# EAGLE board Programming_interface_PCB_Rev5 (EAGLE 9.6.2), part 1 of 2
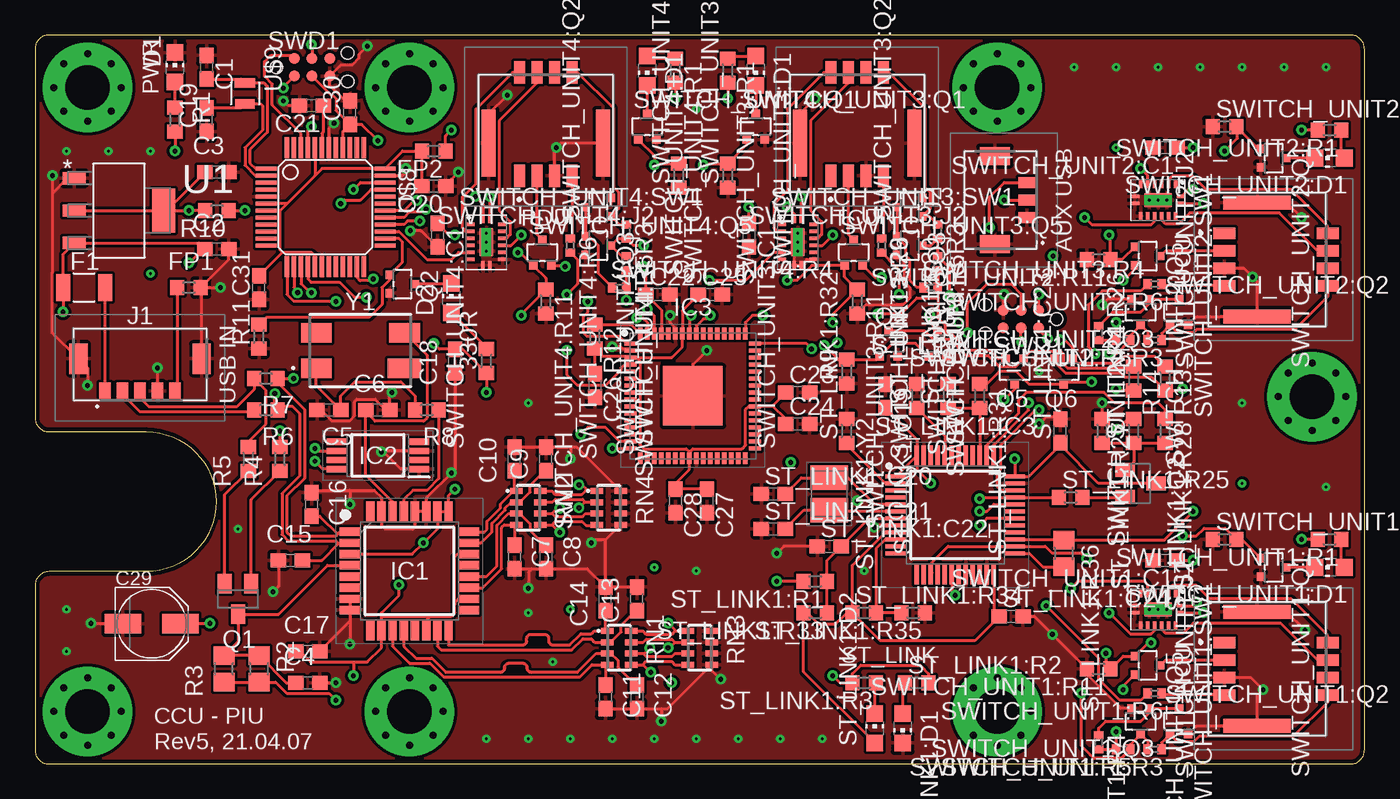
[diagram p0: board, top side]
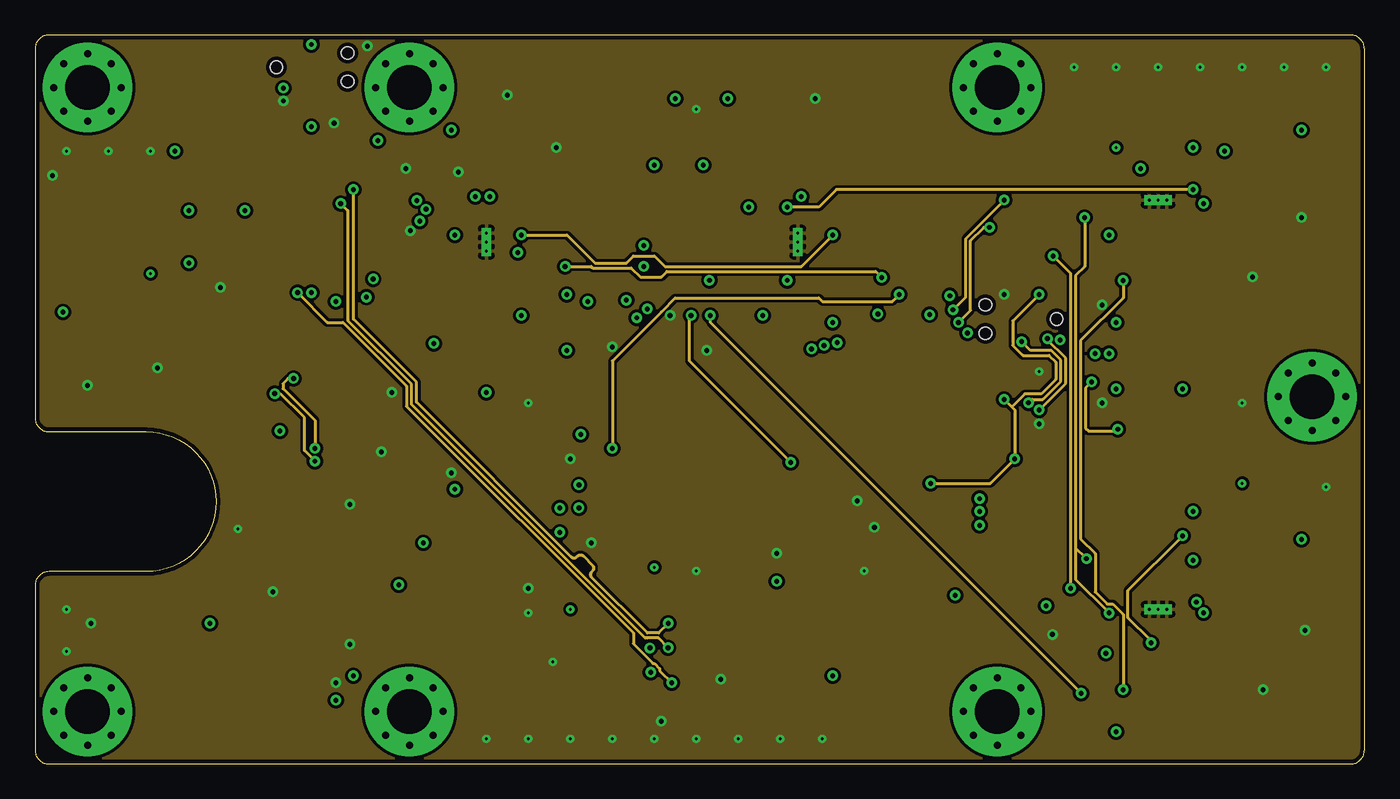
[diagram p1: board, inner layer Route2]
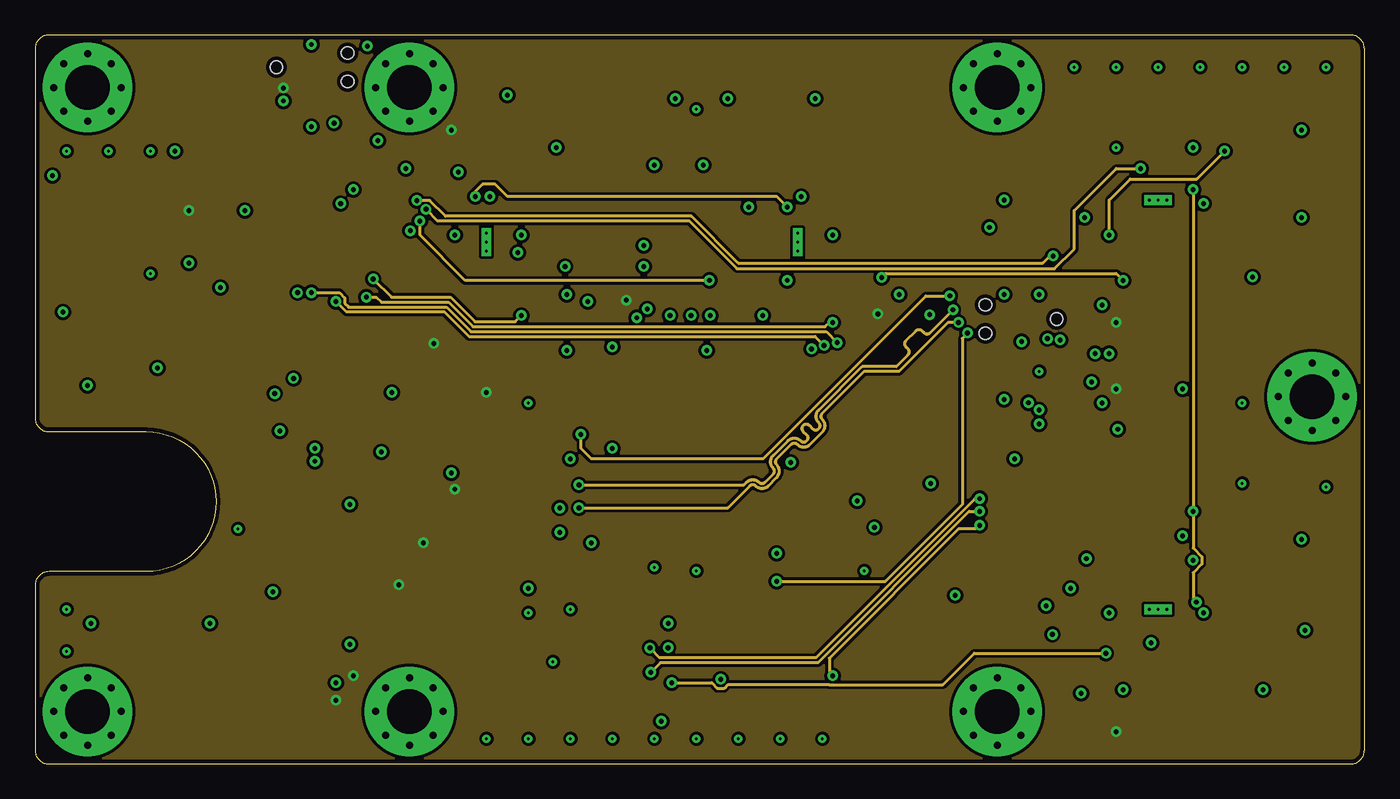
[diagram p2: board, inner layer Route15]
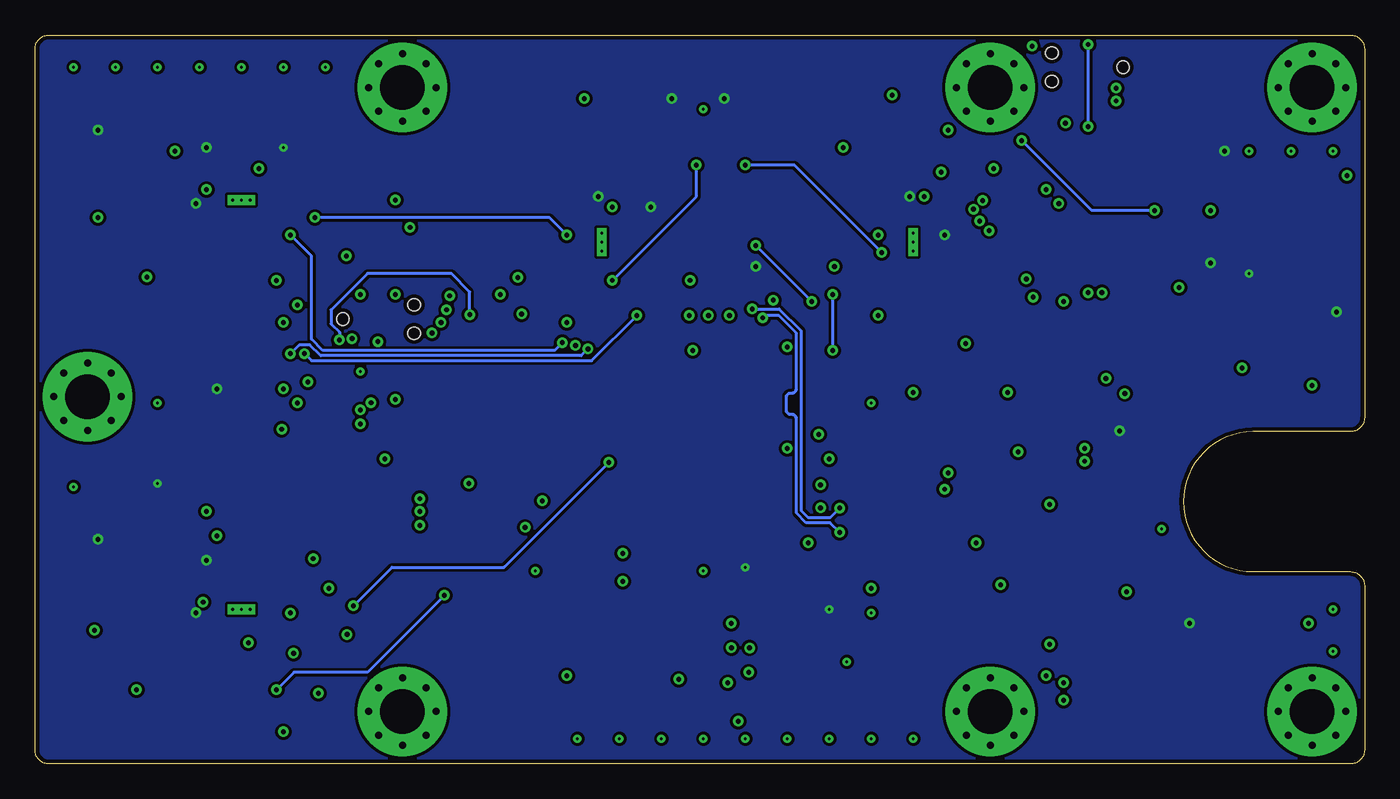
[diagram p3: board, bottom side, seen from below]

Size 95 x 52.11 mm. Coordinates in mm from the lower left corner, seen from the top.
Outline: 94,52.11 1,52.11 arc90 0,51.11 0,24.75 arc90 1,23.75 7.95,23.75 arc-180 7.95,13.75 1,13.75 arc90 0,12.75 0,1 arc90 1,0 94,0 arc90 95,1 95,51.11 arc90 94,52.11
Copper layers (1+2*15+16): Top 0.043mm / dielectric 0.1248mm / Route2 0.035mm / dielectric 1.2mm / Route15 0.035mm / dielectric 0.1248mm / Bottom 0.043mm
Design rules "default *": minimum track width 6mil, minimum drill 0.2mm, track to track 6mil, track to pad 6mil, pad to pad 6mil, via to via 6mil, smd to smd 6mil, copper to edge 0.3mm, drill to drill 6mil, minimum pad ring 10mil, minimum via ring 0.2mm, stop-mask expansion 4mil, vias tented up to drill 0mil, thermal gap 10mil
Net classes: 0 default: width 0.2 mm

## Footprints (pad centres in the part's own frame; a part is rotated, then mirrored left to right if it is on the bottom)
R0603 = smd 1 x 1.1: 1 -0.85,0; 2 0.85,0
C0603 = smd 1.1 x 1: 1 -0.85,0; 2 0.85,0
PANASONIC_C = smd 2.6 x 1.4: + 2.05,0; - -2.05,0
CHIP-LED0805 = smd 1.2 x 1.2: A 0,-1.05; C 0,1.05
OZCJ = smd 1 x 1.9: 1 -1.5,0; 2 1.5,0
QFP80P900X900X160-32N = smd 1.475 x 0.6: 1 -4.238,2.8; 2 -4.238,2; 3 -4.238,1.2; 4 -4.238,0.4; 5 -4.238,-0.4; 6 -4.238,-1.2; 7 -4.238,-2; 8 -4.238,-2.8; 17 4.238,-2.8; 18 4.238,-2; 19 4.238,-1.2; 20 4.238,-0.4; 21 4.238,0.4; 22 4.238,1.2; 23 4.238,2; 24 4.238,2.8 | smd 0.6 x 1.475: 9 -2.8,-4.238; 10 -2,-4.238; 11 -1.2,-4.238; 12 -0.4,-4.238; 13 0.4,-4.238; 14 1.2,-4.238; 15 2,-4.238; 16 2.8,-4.238; 25 2.8,4.238; 26 2,4.238; 27 1.2,4.238; 28 0.4,4.238; 29 -0.4,4.238; 30 -1.2,4.238; 31 -2,4.238; 32 -2.8,4.238
SOP65P640X120-8N = smd 1.475 x 0.45: 1 -2.938,0.975; 2 -2.938,0.325; 3 -2.938,-0.325; 4 -2.938,-0.975; 5 2.938,-0.975; 6 2.938,-0.325; 7 2.938,0.325; 8 2.938,0.975
QFN50P900X900X90-65N = smd 0.85 x 0.3: 1 -4.45,3.75; 2 -4.45,3.25; 3 -4.45,2.75; 4 -4.45,2.25; 5 -4.45,1.75; 6 -4.45,1.25; 7 -4.45,0.75; 8 -4.45,0.25; 9 -4.45,-0.25; 10 -4.45,-0.75; 11 -4.45,-1.25; 12 -4.45,-1.75; 13 -4.45,-2.25; 14 -4.45,-2.75; 15 -4.45,-3.25; 16 -4.45,-3.75; 33 4.45,-3.75; 34 4.45,-3.25; 35 4.45,-2.75; 36 4.45,-2.25; 37 4.45,-1.75; 38 4.45,-1.25; 39 4.45,-0.75; 40 4.45,-0.25; 41 4.45,0.25; 42 4.45,0.75; 43 4.45,1.25; 44 4.45,1.75; 45 4.45,2.25; 46 4.45,2.75; 47 4.45,3.25; 48 4.45,3.75 | smd 0.3 x 0.85: 17 -3.75,-4.45; 18 -3.25,-4.45; 19 -2.75,-4.45; 20 -2.25,-4.45; 21 -1.75,-4.45; 22 -1.25,-4.45; 23 -0.75,-4.45; 24 -0.25,-4.45; 25 0.25,-4.45; 26 0.75,-4.45; 27 1.25,-4.45; 28 1.75,-4.45; 29 2.25,-4.45; 30 2.75,-4.45; 31 3.25,-4.45; 32 3.75,-4.45; 49 3.75,4.45; 50 3.25,4.45; 51 2.75,4.45; 52 2.25,4.45; 53 1.75,4.45; 54 1.25,4.45; 55 0.75,4.45; 56 0.25,4.45; 57 -0.25,4.45; 58 -0.75,4.45; 59 -1.25,4.45; 60 -1.75,4.45; 61 -2.25,4.45; 62 -2.75,4.45; 63 -3.25,4.45; 64 -3.75,4.45 | smd 4.25 x 4.25: 65 0,0
5055680571 = smd 0.8 x 1.2: 1 -2.5,-1.882; 2 -1.25,-1.882; 3 0,-1.882; 4 1.25,-1.882; 5 2.5,-1.882 | smd 1.3 x 2.15: MP1 -4.4,0.412; MP2 4.4,0.412
5055680371 = smd 0.8 x 1.2: 1 -1.25,-1.882; 2 0,-1.882; 3 1.25,-1.882 | smd 1.3 x 2.15: MP1 -3.15,0.412; MP2 3.15,0.412
SOT23 = smd 1 x 1.4: 1 -0.95,-1.1; 2 0.95,-1.1; 3 0,1.1
SOT323 = smd 0.6 x 0.55: 1 -0.65,-0.925; 2 0.65,-0.925; 3 0,0.925
R0805 = smd 1.3 x 1.5: 1 -0.95,0; 2 0.95,0
CAY16-J4 = smd 0.425 x 0.9: 1 -1.2,-0.85; 2 -1.2,0.85; 3 -0.4,-0.85; 4 -0.4,0.85; 5 0.4,-0.85; 6 0.4,0.85; 7 1.2,-0.85; 8 1.2,0.85
QFP50P900X900X160-48N = smd 1.475 x 0.3: 1 -4.238,2.75; 2 -4.238,2.25; 3 -4.238,1.75; 4 -4.238,1.25; 5 -4.238,0.75; 6 -4.238,0.25; 7 -4.238,-0.25; 8 -4.238,-0.75; 9 -4.238,-1.25; 10 -4.238,-1.75; 11 -4.238,-2.25; 12 -4.238,-2.75; 25 4.238,-2.75; 26 4.238,-2.25; 27 4.238,-1.75; 28 4.238,-1.25; 29 4.238,-0.75; 30 4.238,-0.25; 31 4.238,0.25; 32 4.238,0.75; 33 4.238,1.25; 34 4.238,1.75; 35 4.238,2.25; 36 4.238,2.75 | smd 0.3 x 1.475: 13 -2.75,-4.238; 14 -2.25,-4.238; 15 -1.75,-4.238; 16 -1.25,-4.238; 17 -0.75,-4.238; 18 -0.25,-4.238; 19 0.25,-4.238; 20 0.75,-4.238; 21 1.25,-4.238; 22 1.75,-4.238; 23 2.25,-4.238; 24 2.75,-4.238; 37 2.75,4.238; 38 2.25,4.238; 39 1.75,4.238; 40 1.25,4.238; 41 0.75,4.238; 42 0.25,4.238; 43 -0.25,4.238; 44 -0.75,4.238; 45 -1.25,4.238; 46 -1.75,4.238; 47 -2.25,4.238; 48 -2.75,4.238
TC2030-IDC-NL = smd 0.787 x 0.787: 1 1.27,-0.635; 2 1.27,0.635; 3 2.54,-0.635; 4 2.54,0.635; 5 3.81,-0.635; 6 3.81,0.635 | hole 0.889: 0,0; 5.08,-1.016; 5.08,1.016
RESC3226X100N = smd 1.75 x 2.65: 1 -1.15,0; 2 1.15,0
5054330871 = smd 0.8 x 1.6: 1 1.875,3.517; 2 1.875,-3.873; 3 0.625,3.517; 4 0.625,-3.873; 5 -0.625,3.517; 6 -0.625,-3.873; 7 -1.875,3.517; 8 -1.875,-3.873 | smd 1 x 4.8: MP1 4.075,1.177; MP2 -4.075,1.177
R0402 = smd 0.6 x 0.7: 1 -0.5,0; 2 0.5,0
QFN16-4X4 = smd 0.25 x 0.6: 1 -0.25,1.65; 8 -0.25,-1.65; 9 0.25,-1.65; 16 0.25,1.65 | smd 0.6 x 0.25: 2 -1.15,1.25; 3 -1.15,0.75; 4 -1.15,0.25; 5 -1.15,-0.25; 6 -1.15,-0.75; 7 -1.15,-1.25; 10 1.15,-1.25; 11 1.15,-0.75; 12 1.15,-0.25; 13 1.15,0.25; 14 1.15,0.75; 15 1.15,1.25 | smd 1 x 2: EXP 0,0 | drill 0.2 pad 0.4 square: P$1 0,0; P$2 0,0.635; P$3 0,-0.635
SOT230P700X180-4N = smd 1.626 x 0.889: 1 -3.2,2.311; 2 -3.2,0; 3 -3.2,-2.311 | smd 1.626 x 3.175: 4 3.2,0
M3_MOUNTING_HOLE = drill 0.5 pad 0.8: P$1 -2.4,0; P$2 0,2.4; P$3 2.4,0; P$4 0,-2.4; P$5 -1.697,1.697; P$6 1.697,1.697; P$7 1.697,-1.697; P$8 -1.697,-1.697 | drill 3.2 pad 6.4: P$10 0,0
TQFP48 = smd 0.3 x 1.5: 1 -2.75,-4.25; 2 -2.25,-4.25; 3 -1.75,-4.25; 4 -1.25,-4.25; 5 -0.75,-4.25; 6 -0.25,-4.25; 7 0.25,-4.25; 8 0.75,-4.25; 9 1.25,-4.25; 10 1.75,-4.25; 11 2.25,-4.25; 12 2.75,-4.25; 25 2.75,4.25; 26 2.25,4.25; 27 1.75,4.25; 28 1.25,4.25; 29 0.75,4.25; 30 0.25,4.25; 31 -0.25,4.25; 32 -0.75,4.25; 33 -1.25,4.25; 34 -1.75,4.25; 35 -2.25,4.25; 36 -2.75,4.25 | smd 1.5 x 0.3: 13 4.25,-2.75; 14 4.25,-2.25; 15 4.25,-1.75; 16 4.25,-1.25; 17 4.25,-0.75; 18 4.25,-0.25; 19 4.25,0.25; 20 4.25,0.75; 21 4.25,1.25; 22 4.25,1.75; 23 4.25,2.25; 24 4.25,2.75; 37 -4.25,2.75; 38 -4.25,2.25; 39 -4.25,1.75; 40 -4.25,1.25; 41 -4.25,0.75; 42 -4.25,0.25; 43 -4.25,-0.25; 44 -4.25,-0.75; 45 -4.25,-1.25; 46 -4.25,-1.75; 47 -4.25,-2.25; 48 -4.25,-2.75
ST2012SB32768H5KPWAA = smd 0.7 x 1.4: P$1 0.75,0 | smd 0.7 x 1.44: P$2 -0.75,0
ABMM-6.000MHZ-B2-T = smd 2.2 x 1.4: 1 -3.15,-1.27; 2 -3.15,1.27; 3 3.15,1.27 | smd 2.4 x 1.4: 4 3.15,-1.27

## Placement (x,y rotation side)
330R  1K1  [R0603]  32.25,28.8 90 top
C1  4Pf?  [C0603]  12.25,49.8 270 top
C2  0.1uF  [C0603]  13,36.8 0 top
C3  10uF  [C0603]  13,42.3 0 top
C4  0.1uF  [C0603]  19.5,5.8 0 top
C5  33pF  [C0603]  21,25.3 180 top
C6  33pF  [C0603]  24.5,25.3 0 top
C7  22pF  [C0603]  34.25,14.8 270 top
C8  22pF  [C0603]  36.5,14.8 270 top
C9  22pF  [C0603]  36.5,21.8 90 top
C10  22pF  [C0603]  34.25,21.8 90 top
C11  22pF  [C0603]  40.75,4.8 270 top
C12  22pF  [C0603]  43,4.8 270 top
C13  22pF  [C0603]  43,11.8 90 top
C14  22pF  [C0603]  40.75,11.8 90 top
C15  22pF  [C0603]  18.25,14.55 0 top
C16  22pF  [C0603]  19.75,18.55 270 top
C17  0.1uF  [C0603]  19.5,8.05 0 top
C18  0.1uF  [C0603]  30,28.8 90 top
C19  4Pf?  [C0603]  12.25,46.05 90 top
C20  0.1uF  [C0603]  28.5,41.3 180 top
C21  1uF  [C0603]  19.75,47.05 180 top
C22  1uF  [C0603]  44.5,33.55 0 top
C23  1uF  [C0603]  54.5,26.55 0 top
C24  0.1uF  [C0603]  54.5,24.3 0 top
C25  0.1uF  [C0603]  48.25,33.55 0 top
C26  0.1uF  [C0603]  40,27.05 270 top
C27  1uF  [C0603]  48,18.8 270 top
C28  0.1uF  [C0603]  45.75,18.8 270 top
C29  100uF  [PANASONIC_C]  8.34,10.02 0 top
C30  0.1uF  [C0603]  22.5,46.55 90 top
C31  0.1uF  [C0603]  16,34.05 90 top
D1  CHIP-LED0805  [CHIP-LED0805]  10,49.8 0 top
D2  CHIP-LED0805  [CHIP-LED0805]  29.75,33.3 0 top
F1  OZCJ0050  [OZCJ]  3.5,34.05 0 top
FP1  [R0603]  11,34.05 0 top
FP2  [R0603]  28.5,43.8 180 top
IC1  TUSB2046IBVFR  [QFP80P900X900X160-32N]  26.75,13.8 0 top
IC2  SN75240PW  [SOP65P640X120-8N]  24.5,22.05 180 top
IC3  CP2108-B03-GM  [QFN50P900X900X90-65N]  47,26.3 0 top
J1  505568-0571  [5055680571]  7.5,28.55 0 top
J2  505567-0371  [5055680371]  69,40.3 90 top
Q1  BC817  [SOT23]  14.5,11.8 180 top
Q2  2N7002PW,115  [SOT323]  26.25,34.3 270 top
Q3  2N7002PW,115  [SOT323]  64.5,30.05 0 top
Q4  2N7002PW,115  [SOT323]  61,30.05 0 top
Q5  BSS223PW  [SOT323]  70,28.05 180 top
Q6  BSS223PW  [SOT323]  73.5,28.05 180 top
R1  1K6  [R0603]  10,46.05 270 top
R2  22  [R0805]  16,6.8 270 top
R3  1K5  [R0805]  13.5,6.8 90 top
R4  15K  [R0603]  17.5,21.8 90 top
R5  1K5  [R0603]  15.25,21.8 90 top
R6  27  [R0603]  16.5,25.3 180 top
R7  27  [R0603]  16.5,27.55 180 top
R8  1K5  [R0603]  28,25.3 180 top
R9  100K  [R0603]  58,28.05 90 top
R10  10K  [R0603]  13,39.55 180 top
R11  10K  [R0603]  16,30.55 90 top
R12  100K  [R0603]  40,30.55 270 top
R13  10K  [R0603]  80.75,27.55 270 top
R14  10K  [R0603]  78.5,27.55 270 top
RN1  CAY16-27R0F4LF  [CAY16-J4]  41.75,8.3 270 top
RN2  CAY16-27R0F4LF  [CAY16-J4]  35.25,18.3 270 top
RN3  CAY16-1502F4LF  [CAY16-J4]  47.5,8.3 270 top
RN4  CAY16-1502F4LF  [CAY16-J4]  41,18.3 270 top
ST_LINK1:C19  0.1uF  [C0603]  60.75,26.3 270 top
ST_LINK1:C20  10pF  [C0603]  52.75,19.3 0 top
ST_LINK1:C21  10pF  [C0603]  52.75,16.8 0 top
ST_LINK1:C22  0.1uF  [C0603]  56.75,15.55 0 top
ST_LINK1:C23  0.1uF  [C0603]  73.25,23.8 90 top
ST_LINK1:C24  0.1uF  [C0603]  69.75,10.55 0 top
ST_LINK1:D1  CHIP-LED0805  [CHIP-LED0805]  62,2.55 180 top
ST_LINK1:D2  CHIP-LED0805  [CHIP-LED0805]  60,2.55 0 top
ST_LINK1:IC3  STM32F103CBT6TR  [QFP50P900X900X160-48N]  65.75,17.8 0 top
ST_LINK1:Q2  BC817  [SOT23]  79,20.05 270 top
ST_LINK1:R1  0  [R0603]  55.75,13.05 180 top
ST_LINK1:R2  330  [R0603]  63,5.8 0 top
ST_LINK1:R3  330  [R0603]  59.25,5.8 180 top
ST_LINK1:R25  1K5  [R0603]  74,19.05 0 top
ST_LINK1:R26  10K  [R0603]  78.5,23.8 90 top
ST_LINK1:R27  36K  [R0603]  76.25,23.8 270 top
ST_LINK1:R28  100  [R0603]  80.75,23.8 270 top
ST_LINK1:R29  100K  [R0603]  63,26.3 90 top
ST_LINK1:R30  4K7  [R0603]  65.25,26.3 90 top
ST_LINK1:R31  2K7  [R0603]  67.5,26.3 270 top
ST_LINK1:R32  10K  [R0603]  58,23.8 90 top
ST_LINK1:R33  100K  [R0603]  55.75,10.8 180 top
ST_LINK1:R34  4K7  [R0603]  59.25,10.8 0 top
ST_LINK1:R35  4K7  [R0603]  62.75,10.8 180 top
ST_LINK1:R36  100  [R0805]  73.5,15.05 270 top
ST_LINK1:SWD1  SWD_TAGCONNECTNO-LEG  [TC2030-IDC-NL]  73,31.8 180 top
ST_LINK1:Y2  NX3225GD-8MHZ-STD-CRA-3  [RESC3226X100N]  56.75,19.3 270 top
SWD1  SWD_TAGCONNECTNO-LEG  [TC2030-IDC-NL]  17.25,49.8 0 top
SWITCH_UNIT1:C1  0.1uF  [C0603]  80.75,14.55 180 top
SWITCH_UNIT1:D1  CHIP-LED0805  [CHIP-LED0805]  92.5,14.05 90 top
SWITCH_UNIT1:J2  505433-0871  [5054330871]  88.5,6.8 90 top
SWITCH_UNIT1:Q1  2N7002PW,115  [SOT323]  88.5,14.05 270 top
SWITCH_UNIT1:Q2  2N7002PW,115  [SOT323]  81.75,3.05 0 top
SWITCH_UNIT1:Q3  2N7002PW,115  [SOT323]  79,3.05 180 top
SWITCH_UNIT1:Q5  2N7002PW,115  [SOT323]  79.5,7.05 270 top
SWITCH_UNIT1:R1  1K6  [R0603]  92.5,16.05 180 top
SWITCH_UNIT1:R2  -  [R0603]  85,16.05 0 top
SWITCH_UNIT1:R3  -  [R0402]  80,1.05 180 top
SWITCH_UNIT1:R4  1K  [R0402]  76,1.55 270 top
SWITCH_UNIT1:R5  1K  [R0402]  77.75,1.05 180 top
SWITCH_UNIT1:R6  0R  [R0402]  80,5.05 180 top
SWITCH_UNIT1:R11  10K  [R0603]  76,6.8 180 top
SWITCH_UNIT1:SW1  TMUX1309QBQBRQ1  [QFN16-4X4]  80.25,11.05 270 top
SWITCH_UNIT2:C1  0.1uF  [C0603]  80.75,44.05 180 top
SWITCH_UNIT2:D1  CHIP-LED0805  [CHIP-LED0805]  92.5,43.3 90 top
SWITCH_UNIT2:J2  505433-0871  [5054330871]  88.5,36.05 90 top
SWITCH_UNIT2:Q1  2N7002PW,115  [SOT323]  88.5,43.3 270 top
SWITCH_UNIT2:Q2  2N7002PW,115  [SOT323]  81.75,32.3 0 top
SWITCH_UNIT2:Q3  2N7002PW,115  [SOT323]  79,32.3 180 top
SWITCH_UNIT2:Q5  2N7002PW,115  [SOT323]  79.5,36.3 270 top
SWITCH_UNIT2:R1  1K6  [R0603]  92.5,45.3 180 top
SWITCH_UNIT2:R2  -  [R0603]  85,45.55 0 top
SWITCH_UNIT2:R3  -  [R0402]  80,30.3 180 top
SWITCH_UNIT2:R4  1K  [R0402]  76,30.8 270 top
SWITCH_UNIT2:R5  1K  [R0402]  77.75,30.3 180 top
SWITCH_UNIT2:R6  0R  [R0402]  80,34.3 180 top
SWITCH_UNIT2:R11  10K  [R0603]  76,36.05 180 top
SWITCH_UNIT2:SW1  TMUX1309QBQBRQ1  [QFN16-4X4]  80.25,40.3 270 top
SWITCH_UNIT3:C1  0.1uF  [C0603]  51,37.8 270 top
SWITCH_UNIT3:D1  CHIP-LED0805  [CHIP-LED0805]  51.5,49.55 180 top
SWITCH_UNIT3:J2  505433-0871  [5054330871]  58.75,45.55 180 top
SWITCH_UNIT3:Q1  2N7002PW,115  [SOT323]  51.5,45.55 0 top
SWITCH_UNIT3:Q2  2N7002PW,115  [SOT323]  62.5,39.8 90 top
SWITCH_UNIT3:Q3  2N7002PW,115  [SOT323]  62.5,37.05 270 top
SWITCH_UNIT3:Q5  2N7002PW,115  [SOT323]  58.5,36.55 0 top
SWITCH_UNIT3:R1  1K6  [R0603]  49.5,49.55 270 top
SWITCH_UNIT3:R2  -  [R0603]  49.5,42.05 90 top
SWITCH_UNIT3:R3  -  [R0402]  64.5,38.05 270 top
SWITCH_UNIT3:R4  1K  [R0402]  64,34.05 0 top
SWITCH_UNIT3:R5  1K  [R0402]  64.5,35.8 270 top
SWITCH_UNIT3:R6  0R  [R0402]  60.5,37.05 270 top
SWITCH_UNIT3:R11  10K  [R0603]  58.75,33.05 270 top
SWITCH_UNIT3:SW1  TMUX1309QBQBRQ1  [QFN16-4X4]  54.5,37.3 0 top
SWITCH_UNIT4:C1  0.1uF  [C0603]  28.75,37.8 270 top
SWITCH_UNIT4:D1  CHIP-LED0805  [CHIP-LED0805]  43.75,49.55 180 top
SWITCH_UNIT4:J2  505433-0871  [5054330871]  36.5,45.55 180 top
SWITCH_UNIT4:Q1  2N7002PW,115  [SOT323]  43.75,45.55 0 top
SWITCH_UNIT4:Q2  2N7002PW,115  [SOT323]  40.25,39.8 90 top
SWITCH_UNIT4:Q3  2N7002PW,115  [SOT323]  40.25,37.05 270 top
SWITCH_UNIT4:Q5  2N7002PW,115  [SOT323]  36.25,36.55 0 top
SWITCH_UNIT4:R1  1K6  [R0603]  45.75,49.55 270 top
SWITCH_UNIT4:R2  -  [R0603]  46,42.05 90 top
SWITCH_UNIT4:R3  -  [R0402]  42.25,38.05 270 top
SWITCH_UNIT4:R4  1K  [R0402]  41.75,34.05 0 top
SWITCH_UNIT4:R5  1K  [R0402]  42.25,35.8 270 top
SWITCH_UNIT4:R6  0R  [R0402]  38.25,37.05 270 top
SWITCH_UNIT4:R11  10K  [R0603]  36.5,33.05 270 top
SWITCH_UNIT4:SW1  TMUX1309QBQBRQ1  [QFN16-4X4]  32.25,37.3 0 top
U1  LD1117S33TR  [SOT230P700X180-4N]  6,39.55 0 top
U$1  M3_MOUNTING_HOLE  [M3_MOUNTING_HOLE]  3.75,3.75 0 top
U$2  M3_MOUNTING_HOLE  [M3_MOUNTING_HOLE]  26.75,3.75 0 top
U$3  M3_MOUNTING_HOLE  [M3_MOUNTING_HOLE]  68.75,3.75 0 top
U$4  M3_MOUNTING_HOLE  [M3_MOUNTING_HOLE]  91.25,26.25 0 top
U$5  M3_MOUNTING_HOLE  [M3_MOUNTING_HOLE]  3.75,48.36 0 top
U$6  M3_MOUNTING_HOLE  [M3_MOUNTING_HOLE]  26.75,48.36 0 top
U$7  M3_MOUNTING_HOLE  [M3_MOUNTING_HOLE]  68.75,48.36 0 top
U$8  SAMD21G18A-ARDUINO  [TQFP48]  20.75,39.8 270 top
U$9  ST2012SB32768H5KPWAA  [ST2012SB32768H5KPWAA]  15,47.93 270 top
Y1  ABMM-6.000MHZ-B2-T  [ABMM-6.000MHZ-B2-T]  23.25,29.55 0 top

## Library data of the parts
330R C1-C31 FP1 FP2 R1-R14 ST_LINK1:C19-ST_LINK1:C24 ST_LINK1:R1-ST_LINK1:R3 ST_LINK1:R25-ST_LINK1:R36 SWITCH_UNIT1:C1 SWITCH_UNIT1:R1-SWITCH_UNIT1:R6 SWITCH_UNIT1:R11 SWITCH_UNIT2:C1 SWITCH_UNIT2:R1-SWITCH_UNIT2:R6 SWITCH_UNIT2:R11 SWITCH_UNIT3:C1 SWITCH_UNIT3:R1-SWITCH_UNIT3:R6 SWITCH_UNIT3:R11 SWITCH_UNIT4:C1 SWITCH_UNIT4:R1-SWITCH_UNIT4:R6 SWITCH_UNIT4:R11 = CASE-RCL
D1 D2 ST_LINK1:D1 ST_LINK1:D2 SWITCH_UNIT1:D1 SWITCH_UNIT2:D1 SWITCH_UNIT3:D1 SWITCH_UNIT4:D1 = CASE-LED
F1 = CASE-Fuse
IC1 = Programming_interface_lib; DESCRIPTION: USB Interface IC 4-Port 12 Mbps USB Full-Speed Hub W/Optional Serial EEPROM Interface 32-LQFP -40 to 85; HEIGHT: 1.6mm; MANUFACTURER_NAME: Texas Instruments; MANUFACTURER_PART_NUMBER: TUSB2046IBVFR; MOUSER_PART_NUMBER: 595-TUSB2046IBVFR; MOUSER_PRICE-STOCK: https://www.mouser.com/Search/Refine.aspx?Keyword=595-TUSB2046IBVFR
IC2 = Programming_interface_lib; DESCRIPTION: Dual USB Port Transient Suppressor; HEIGHT: 1.2mm; MANUFACTURER_NAME: Texas Instruments; MANUFACTURER_PART_NUMBER: SN75240PW; MOUSER_PART_NUMBER: 595-SN75240PW; MOUSER_PRICE-STOCK: https://www.mouser.com/Search/Refine.aspx?Keyword=595-SN75240PW; RS_PART_NUMBER: 6199853P; RS_PRICE-STOCK: http://uk.rs-online.com/web/p/products/6199853P
IC3 = Programming_interface_lib; DESCRIPTION: SILICON LABS - CP2108-B03-GM - USB TO UART BRIDGE, -40 TO 85DEG C; HEIGHT: 0.9mm; MANUFACTURER_NAME: Silicon Labs; MANUFACTURER_PART_NUMBER: CP2108-B03-GM
J1 = Programming_interface_lib; ALLIED_NUMBER: 71085525; DESCRIPTION: Headers & Wire Housings MicroLockPlus 1.25MM VERT HDR SR 5CKT BLK; HEIGHT: 4.05mm; MANUFACTURER_NAME: Molex; MANUFACTURER_PART_NUMBER: 505568-0571; RS_PART_NUMBER: 1615926P; RS_PRICE-STOCK: http://uk.rs-online.com/web/p/products/1615926P
J2 = RescueRunner
Q1-Q6 ST_LINK1:Q2 SWITCH_UNIT1:Q1-SWITCH_UNIT1:Q3 SWITCH_UNIT1:Q5 SWITCH_UNIT2:Q1-SWITCH_UNIT2:Q3 SWITCH_UNIT2:Q5 SWITCH_UNIT3:Q1-SWITCH_UNIT3:Q3 SWITCH_UNIT3:Q5 SWITCH_UNIT4:Q1-SWITCH_UNIT4:Q3 SWITCH_UNIT4:Q5 = CASE-Transistors
RN1-RN4 = RescueRunner; ALLIED_NUMBER: 70276336; DESCRIPTION: BOURNS - CAY16-270J4LF - RESISTOR, ARRAY, 27R, 5%, 0.125W; HEIGHT: mm; MANUFACTURER_NAME: Bourns; MANUFACTURER_PART_NUMBER: CAY16-270J4LF; RS_PART_NUMBER: 7408782; RS_PRICE-STOCK: http://uk.rs-online.com/web/p/products/7408782
ST_LINK1:IC3 = Programming_interface_lib; DESCRIPTION: STMICROELECTRONICS - STM32F103CBT6TR - ARM MCU, STM32 Family STM32F1 Series Microcontrollers, ARM Cortex-M3, 32bit, 72 MHz, 128 KB, 20 KB; HEIGHT: 1.6mm; MANUFACTURER_NAME: STMicroelectronics; MANUFACTURER_PART_NUMBER: STM32F103CBT6TR
ST_LINK1:SWD1 SWD1 = CASE-Prog_Header
ST_LINK1:Y2 = Programming_interface_lib; DESCRIPTION: A small surface-mount type crystal unit, ideal for an engine control CPU clock; delivering the high reliability that is particularly demanded by automotive; HEIGHT: 1mm; MANUFACTURER_NAME: NDK; MANUFACTURER_PART_NUMBER: NX3225GD-8MHZ-STD-CRA-3; RS_PART_NUMBER: 1847983; RS_PRICE-STOCK: http://uk.rs-online.com/web/p/products/1847983
SWITCH_UNIT1:J2 SWITCH_UNIT2:J2 SWITCH_UNIT3:J2 SWITCH_UNIT4:J2 = Programming_interface_lib; DESCRIPTION: CONN HEADER SMD 8POS 1.25MM; HEIGHT: 7.25mm; MANUFACTURER_NAME: Molex; MANUFACTURER_PART_NUMBER: 5054330871
SWITCH_UNIT1:SW1 SWITCH_UNIT2:SW1 SWITCH_UNIT3:SW1 SWITCH_UNIT4:SW1 U$1-U$9 = Programming_interface_lib
U1 = CASE-Voltage_regulators; MPN: LD1117S33TR; OC_FARNELL: 2253484; OC_NEWARK: 89K0627; PACKAGE: SOT223-3; SUPPLIER: STMicroelectronics
Y1 = Programming_interface_lib; DESCRIPTION: Crystals 6.000MHz, 18pF 20ppm; HEIGHT: mm; MANUFACTURER_NAME: ABRACON; MANUFACTURER_PART_NUMBER: ABMM-6.000MHZ-B2-T; RS_PART_NUMBER: 1712721P; RS_PRICE-STOCK: http://uk.rs-online.com/web/p/products/1712721P

## Nets
+3V3: 330R.1 C3.1 C17.1 C18.2 FP2.1 IC1.3 IC1.10 IC1.14 IC1.18 IC1.22 IC1.25 IC1.26 Q5.2 R2.2 R3.1 R10.2 R14.2 SWD1.1 SWITCH_UNIT1:R4.2 SWITCH_UNIT1:R5.2 SWITCH_UNIT2:R4.2 SWITCH_UNIT2:R5.2 SWITCH_UNIT3:R4.2 SWITCH_UNIT3:R5.2 SWITCH_UNIT4:R4.2 SWITCH_UNIT4:R5.2 U1.2 U1.4
+5V: C2.1 C22.1 C29.+ F1.1 IC3.60 IC3.61 Q6.2 R1.2 R4.2 R13.2 SWITCH_UNIT1:C1.1 SWITCH_UNIT1:R1.2 SWITCH_UNIT1:SW1.16 SWITCH_UNIT2:C1.1 SWITCH_UNIT2:R1.2 SWITCH_UNIT2:SW1.16 SWITCH_UNIT3:C1.1 SWITCH_UNIT3:R1.2 SWITCH_UNIT3:SW1.16 SWITCH_UNIT4:C1.1 SWITCH_UNIT4:R1.2 SWITCH_UNIT4:SW1.16 U1.3
D1_2_N: C11.1 IC1.11 RN1.7
D1_2_P: C12.1 IC1.12 RN1.5
D1_N: RN1.8 RN3.7 ST_LINK1:IC3.32
D1_P: RN1.6 RN3.5 ST_LINK1:IC3.33 ST_LINK1:R25.1
D2_2_N: C13.1 IC1.15 RN1.3
D2_2_P: C14.1 IC1.16 RN1.1
D2_N: RN1.4 RN3.3 U$8.33
D2_P: RN1.2 RN3.1 U$8.34
D3_2_N: C7.1 IC1.19 RN2.7
D3_2_P: C8.1 IC1.20 RN2.5
D3_N: IC3.63 RN2.8 RN4.7
D3_P: IC3.62 RN2.6 RN4.5
D4_2_N: C9.1 IC1.23 RN2.3
D4_2_P: C10.1 IC1.24 RN2.1
D4_N: J2.3 RN2.4 RN4.3
D4_P: J2.2 RN2.2 RN4.1
GND: C1.1 C2.2 C3.2 C4.2 C5.2 C6.2 C7.2 C8.2 C9.2 C10.2 C11.2 C12.2 C13.2 C14.2 C15.1 C16.1 C17.2 C18.1 C19.1 C20.1 C21.2 C22.2 C23.2 C24.2 C25.2 C26.2 C27.2 C28.2 C29.- C30.2 C31.1 D1.C FP1.2 IC1.7 IC1.8 IC1.27 IC1.28 IC1.31 IC2.1 IC2.3 IC3.2 IC3.25 IC3.59 IC3.65 J1.4 J1.MP1 J1.MP2 J2.1 J2.MP1 J2.MP2 Q2.2 Q3.2 Q4.2 R9.1 R11.1 RN3.2 RN3.4 RN3.6 RN3.8 RN4.2 RN4.4 RN4.6 RN4.8 ST_LINK1:C19.1 ST_LINK1:C20.1 ST_LINK1:C21.1 ST_LINK1:C22.1 ST_LINK1:C23.2 ST_LINK1:C24.2 ST_LINK1:D1.C ST_LINK1:IC3.8 ST_LINK1:IC3.20 ST_LINK1:IC3.23 ST_LINK1:IC3.35 ST_LINK1:IC3.47 ST_LINK1:R27.1 ST_LINK1:R29.2 ST_LINK1:R30.2 ST_LINK1:R32.2 ST_LINK1:R35.1 ST_LINK1:SWD1.5 SWD1.5 SWITCH_UNIT1:C1.2 SWITCH_UNIT1:J2.5 SWITCH_UNIT1:J2.MP1 SWITCH_UNIT1:J2.MP2 SWITCH_UNIT1:Q1.2 SWITCH_UNIT1:Q2.2 SWITCH_UNIT1:Q3.2 SWITCH_UNIT1:R2.1 SWITCH_UNIT1:R11.2 SWITCH_UNIT1:SW1.8 SWITCH_UNIT1:SW1.9 SWITCH_UNIT1:SW1.10 SWITCH_UNIT1:SW1.EXP SWITCH_UNIT1:SW1.P$1 SWITCH_UNIT1:SW1.P$2 SWITCH_UNIT1:SW1.P$3 SWITCH_UNIT2:C1.2 SWITCH_UNIT2:J2.5 SWITCH_UNIT2:J2.MP1 SWITCH_UNIT2:J2.MP2 SWITCH_UNIT2:Q1.2 SWITCH_UNIT2:Q2.2 SWITCH_UNIT2:Q3.2 SWITCH_UNIT2:R2.1 SWITCH_UNIT2:R11.2 SWITCH_UNIT2:SW1.8 SWITCH_UNIT2:SW1.9 SWITCH_UNIT2:SW1.10 SWITCH_UNIT2:SW1.EXP SWITCH_UNIT2:SW1.P$1 SWITCH_UNIT2:SW1.P$2 SWITCH_UNIT2:SW1.P$3 SWITCH_UNIT3:C1.2 SWITCH_UNIT3:J2.5 SWITCH_UNIT3:J2.MP1 SWITCH_UNIT3:J2.MP2 SWITCH_UNIT3:Q1.2 SWITCH_UNIT3:Q2.2 SWITCH_UNIT3:Q3.2 SWITCH_UNIT3:R2.1 SWITCH_UNIT3:R11.2 SWITCH_UNIT3:SW1.8 SWITCH_UNIT3:SW1.9 SWITCH_UNIT3:SW1.10 SWITCH_UNIT3:SW1.EXP SWITCH_UNIT3:SW1.P$1 SWITCH_UNIT3:SW1.P$2 SWITCH_UNIT3:SW1.P$3 SWITCH_UNIT4:C1.2 SWITCH_UNIT4:J2.5 SWITCH_UNIT4:J2.MP1 SWITCH_UNIT4:J2.MP2 SWITCH_UNIT4:Q1.2 SWITCH_UNIT4:Q2.2 SWITCH_UNIT4:Q3.2 SWITCH_UNIT4:R2.1 SWITCH_UNIT4:R11.2 SWITCH_UNIT4:SW1.8 SWITCH_UNIT4:SW1.9 SWITCH_UNIT4:SW1.10 SWITCH_UNIT4:SW1.EXP SWITCH_UNIT4:SW1.P$1 SWITCH_UNIT4:SW1.P$2 SWITCH_UNIT4:SW1.P$3 U1.1 U$8.5 U$8.18 U$8.35 U$8.42
GND_2: IC2.5
GND_3: IC2.7
N$1: C4.1 IC1.4 Q1.3 R2.1 R3.2
N$2: FP1.1 J1.5
N$3: Q1.1 R4.1
N$4: Q1.2 R5.1
N$5: Q4.3 Q5.1 R14.1
N$6: Q3.3 Q6.1 R13.1
N$7: D1.A R1.1
N$8: C20.2 C31.2 FP2.2 U$8.6 U$8.17 U$8.36 U$8.44
N$9: C1.2 U$8.1 U$9.P$2
N$10: IC1.29 R8.1
N$11: C6.1 IC1.30 Y1.3
N$12: C5.1 R8.2 Y1.1
N$13: C19.2 U$8.2 U$9.P$1
N$14: SWD1.2 U$8.46
N$15: C30.1 R10.1 SWD1.3 U$8.40
N$16: SWD1.4 U$8.45
N$17: C21.1 U$8.43
N$18: 330R.2 D2.A
N$19: IC3.64 R12.1
N$20: D2.C Q2.3
N$21: Q6.3 ST_LINK1:R26.2 ST_LINK1:R31.1
N$22: Q2.1 R11.2 U$8.26
N$23: Q5.3 ST_LINK1:C19.2 ST_LINK1:C23.1 ST_LINK1:C24.1 ST_LINK1:D2.A ST_LINK1:IC3.1 ST_LINK1:IC3.9 ST_LINK1:IC3.24 ST_LINK1:IC3.36 ST_LINK1:IC3.48 ST_LINK1:Q2.3 ST_LINK1:R33.2 ST_LINK1:R34.1 ST_LINK1:SWD1.1
N$27: F1.2 J1.1
NCU_NRST_ON: SWITCH_UNIT1:Q1.1 SWITCH_UNIT1:Q5.1 SWITCH_UNIT1:R2.2 SWITCH_UNIT1:R11.1 U$8.14
NCU_ON: SWITCH_UNIT1:SW1.6 U$8.30
PDU_NRST_ON: SWITCH_UNIT4:Q1.1 SWITCH_UNIT4:Q5.1 SWITCH_UNIT4:R2.2 SWITCH_UNIT4:R11.1 U$8.23
PDU_ON: SWITCH_UNIT4:SW1.6 U$8.27
RX_NCU: IC3.56 SWITCH_UNIT1:Q3.3 SWITCH_UNIT1:R3.2 SWITCH_UNIT1:R5.1
RX_PDU: IC3.1 SWITCH_UNIT4:Q3.3 SWITCH_UNIT4:R3.2 SWITCH_UNIT4:R5.1
RX_TCU: IC3.15 SWITCH_UNIT3:Q3.3 SWITCH_UNIT3:R3.2 SWITCH_UNIT3:R5.1
RX_UCU: IC3.48 SWITCH_UNIT2:Q3.3 SWITCH_UNIT2:R3.2 SWITCH_UNIT2:R5.1
ST_LINK1:N$1: ST_LINK1:D1.A ST_LINK1:R2.1
ST_LINK1:N$3: ST_LINK1:D2.C ST_LINK1:R3.1
ST_LINK1:N$7: ST_LINK1:Q2.2 ST_LINK1:R25.2
ST_LINK1:N$8: ST_LINK1:Q2.1 ST_LINK1:R26.1 ST_LINK1:R27.2 ST_LINK1:R28.2
ST_LINK1:N$15: ST_LINK1:IC3.39 ST_LINK1:R30.1 ST_LINK1:R31.2
ST_LINK1:N$16: ST_LINK1:IC3.2 ST_LINK1:R32.1
ST_LINK1:N$21: ST_LINK1:IC3.44 ST_LINK1:R29.1
ST_LINK1:N$22: ST_LINK1:C20.2 ST_LINK1:IC3.5 ST_LINK1:Y2.1
ST_LINK1:N$23: ST_LINK1:IC3.10 ST_LINK1:R34.2 ST_LINK1:R35.2
ST_LINK1:N$24: ST_LINK1:C21.2 ST_LINK1:IC3.6 ST_LINK1:Y2.2
ST_LINK1:N$25: ST_LINK1:C22.2 ST_LINK1:IC3.7 ST_LINK1:R1.1 ST_LINK1:R33.1
ST_LINK1:N$26: ST_LINK1:IC3.25 ST_LINK1:R36.2
ST_LINK1:STLK_LED: ST_LINK1:IC3.30 ST_LINK1:R2.2 ST_LINK1:R3.2
ST_LINK1:STLK_RX: ST_LINK1:IC3.13
ST_LINK1:STLK_TX: ST_LINK1:IC3.12
ST_LINK1:STM_NRST: ST_LINK1:R1.2 ST_LINK1:SWD1.3
ST_LINK1:STM_SWCLK: ST_LINK1:IC3.37 ST_LINK1:SWD1.4
ST_LINK1:STM_SWDIO: ST_LINK1:IC3.34 ST_LINK1:SWD1.2
ST_LINK1:SWO: ST_LINK1:IC3.31
ST_LINK1:USB_RENUM: ST_LINK1:IC3.38 ST_LINK1:R28.1
ST_LINK_EN: Q3.1 Q4.1 R9.2 U$8.13
ST_LINK_NRST_OUT: ST_LINK1:IC3.18 SWITCH_UNIT1:Q5.2 SWITCH_UNIT2:Q5.2 SWITCH_UNIT3:Q5.2 SWITCH_UNIT4:Q5.2
ST_LINK_SWDCLK_OUT: ST_LINK1:IC3.15 ST_LINK1:IC3.26 SWITCH_UNIT1:SW1.12 SWITCH_UNIT2:SW1.12 SWITCH_UNIT3:SW1.12 SWITCH_UNIT4:SW1.12
ST_LINK_SWDIO_OUT: ST_LINK1:IC3.27 ST_LINK1:R36.1 SWITCH_UNIT1:SW1.1 SWITCH_UNIT2:SW1.1 SWITCH_UNIT3:SW1.1 SWITCH_UNIT4:SW1.1
SWITCH_UNIT1:N$2: SWITCH_UNIT1:D1.C SWITCH_UNIT1:Q1.3
SWITCH_UNIT1:N$3: SWITCH_UNIT1:D1.A SWITCH_UNIT1:R1.1
SWITCH_UNIT1:N$4: SWITCH_UNIT1:Q2.3 SWITCH_UNIT1:Q3.1 SWITCH_UNIT1:R4.1
SWITCH_UNIT1:RX_STM32: SWITCH_UNIT1:J2.7 SWITCH_UNIT1:R6.1
SWITCH_UNIT1:TX_STM32: SWITCH_UNIT1:J2.8 SWITCH_UNIT1:Q2.1 SWITCH_UNIT1:R3.1
SWITCH_UNIT1:UNIT_NRST: SWITCH_UNIT1:J2.3 SWITCH_UNIT1:Q5.3
SWITCH_UNIT1:UNIT_SWCLK: SWITCH_UNIT1:J2.4 SWITCH_UNIT1:SW1.13
SWITCH_UNIT1:UNIT_SWDIO: SWITCH_UNIT1:J2.2 SWITCH_UNIT1:SW1.3
SWITCH_UNIT2:N$2: SWITCH_UNIT2:D1.C SWITCH_UNIT2:Q1.3
SWITCH_UNIT2:N$3: SWITCH_UNIT2:D1.A SWITCH_UNIT2:R1.1
SWITCH_UNIT2:N$4: SWITCH_UNIT2:Q2.3 SWITCH_UNIT2:Q3.1 SWITCH_UNIT2:R4.1
SWITCH_UNIT2:RX_STM32: SWITCH_UNIT2:J2.7 SWITCH_UNIT2:R6.1
SWITCH_UNIT2:TX_STM32: SWITCH_UNIT2:J2.8 SWITCH_UNIT2:Q2.1 SWITCH_UNIT2:R3.1
SWITCH_UNIT2:UNIT_NRST: SWITCH_UNIT2:J2.3 SWITCH_UNIT2:Q5.3
SWITCH_UNIT2:UNIT_SWCLK: SWITCH_UNIT2:J2.4 SWITCH_UNIT2:SW1.13
SWITCH_UNIT2:UNIT_SWDIO: SWITCH_UNIT2:J2.2 SWITCH_UNIT2:SW1.3
SWITCH_UNIT3:N$2: SWITCH_UNIT3:D1.C SWITCH_UNIT3:Q1.3
SWITCH_UNIT3:N$3: SWITCH_UNIT3:D1.A SWITCH_UNIT3:R1.1
SWITCH_UNIT3:N$4: SWITCH_UNIT3:Q2.3 SWITCH_UNIT3:Q3.1 SWITCH_UNIT3:R4.1
SWITCH_UNIT3:RX_STM32: SWITCH_UNIT3:J2.7 SWITCH_UNIT3:R6.1
SWITCH_UNIT3:TX_STM32: SWITCH_UNIT3:J2.8 SWITCH_UNIT3:Q2.1 SWITCH_UNIT3:R3.1
SWITCH_UNIT3:UNIT_NRST: SWITCH_UNIT3:J2.3 SWITCH_UNIT3:Q5.3
SWITCH_UNIT3:UNIT_SWCLK: SWITCH_UNIT3:J2.4 SWITCH_UNIT3:SW1.13
SWITCH_UNIT3:UNIT_SWDIO: SWITCH_UNIT3:J2.2 SWITCH_UNIT3:SW1.3
SWITCH_UNIT4:N$2: SWITCH_UNIT4:D1.C SWITCH_UNIT4:Q1.3
SWITCH_UNIT4:N$3: SWITCH_UNIT4:D1.A SWITCH_UNIT4:R1.1
SWITCH_UNIT4:N$4: SWITCH_UNIT4:Q2.3 SWITCH_UNIT4:Q3.1 SWITCH_UNIT4:R4.1
SWITCH_UNIT4:RX_STM32: SWITCH_UNIT4:J2.7 SWITCH_UNIT4:R6.1
SWITCH_UNIT4:TX_STM32: SWITCH_UNIT4:J2.8 SWITCH_UNIT4:Q2.1 SWITCH_UNIT4:R3.1
SWITCH_UNIT4:UNIT_NRST: SWITCH_UNIT4:J2.3 SWITCH_UNIT4:Q5.3
SWITCH_UNIT4:UNIT_SWCLK: SWITCH_UNIT4:J2.4 SWITCH_UNIT4:SW1.13
SWITCH_UNIT4:UNIT_SWDIO: SWITCH_UNIT4:J2.2 SWITCH_UNIT4:SW1.3
TCU_NRST_ON: SWITCH_UNIT3:Q1.1 SWITCH_UNIT3:Q5.1 SWITCH_UNIT3:R2.2 SWITCH_UNIT3:R11.1 U$8.16
TCU_ON: SWITCH_UNIT3:SW1.6 U$8.28
TX_NCU: IC3.57 SWITCH_UNIT1:R6.2
TX_PDU: IC3.4 SWITCH_UNIT4:R6.2
TX_TCU: IC3.16 SWITCH_UNIT3:R6.2
TX_UCU: IC3.49 SWITCH_UNIT2:R6.2
UCU_NRST_ON: SWITCH_UNIT2:Q1.1 SWITCH_UNIT2:Q5.1 SWITCH_UNIT2:R2.2 SWITCH_UNIT2:R11.1 U$8.15
UCU_ON: SWITCH_UNIT2:SW1.6 U$8.29
USB_D1_N: C15.2 IC1.2 IC2.8 R6.1
USB_D1_P: C16.2 IC1.1 IC2.6 R7.1
USB_D2_N: J1.2 R6.2
USB_D2_P: J1.3 R5.2 R7.2
VIO: C23.1 C24.1 C25.1 C26.1 C27.1 C28.1 IC3.3 IC3.24 IC3.39 IC3.58 R12.2